# EAGLE board SOT23-6_2xSOT23 (EAGLE 6.4)
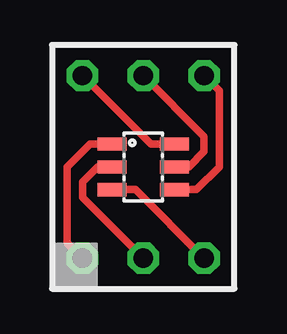
[diagram p0: board, top side]
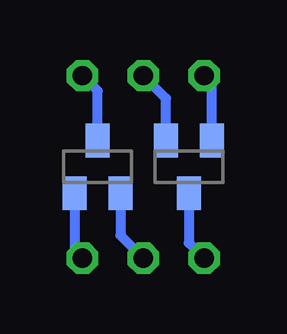
[diagram p1: board, bottom side, seen from below]

No outline drawn. Coordinates in mm, seen from the top.
Copper layers (1*16): Top 0.035mm / dielectric 1.5mm / Bottom 0.035mm
Design rules "default": minimum track width 10mil, minimum drill 0.6mm, track to track 8mil, track to pad 8mil, pad to pad 8mil, via to via 8mil, smd to smd 8mil, copper to edge 40mil, drill to drill 8mil, minimum pad ring 10mil, minimum via ring 8mil, stop-mask expansion 4mil, vias tented up to drill 0mil, thermal gap 10mil

## Footprints (pad centres in the part's own frame; a part is rotated, then mirrored left to right if it is on the bottom)
1 = drill 0.8 octagon: P$1 0,0
SOT23-6L = smd 0.55 x 1.2: 1 -0.95,-1.3; 2 0,-1.3; 3 0.95,-1.3; 4 0.95,1.3; 5 0,1.3; 6 -0.95,1.3
SOT23B-3 = smd 1 x 1.4: 1 -0.95,-1.1; 2 0.95,-1.1; 3 0,1.1

## Placement (x,y rotation side)
E$1  [1]  1.27,8.89 0 top
E$2  [SOT23-6L]  3.81,5.08 270 top
E$3  [1]  3.81,8.89 0 top
E$4  [1]  6.35,8.89 0 top
E$5  [1]  1.27,1.27 0 top
E$6  [1]  3.81,1.27 0 top
E$7  [1]  6.35,1.27 0 top
E$8  [SOT23B-3]  1.91,5.08 180 bottom
E$9  [SOT23B-3]  5.71,5.08 0 bottom

## Library data of the parts
E$1 E$3-E$7 = drill
E$2 E$8 E$9 = ref-packages

## Nets
S$1: E$2.1 E$5.P$1 E$8.3
S$2: E$2.2 E$6.P$1 E$9.2
S$3: E$2.3 E$7.P$1 E$9.1
S$4: E$2.4 E$4.P$1 E$9.3
S$5: E$2.5 E$3.P$1 E$8.2
S$6: E$1.P$1 E$2.6 E$8.1

## Tracks (layer width: path | path; a pad name or v marks a point on that pad's centre or on a via)
S$1
  Top 0.305: E$5.P$1 0.64,1.91 0.64,5.08 1.58,6.03 E$2.1
  Bottom 0.406: E$8.3 1.91,1.91 E$5.P$1
S$2
  Top 0.305: E$6.P$1 1.27,3.81 1.27,4.45 1.91,5.08 E$2.2
  Bottom 0.406: E$9.2 4.76,2.23 E$6.P$1
S$3
  Top 0.305: E$7.P$1 3.49,4.13 E$2.3
  Bottom 0.406: E$9.1 6.67,1.58 E$7.P$1
S$4
  Top 0.305: E$4.P$1 6.99,8.26 6.99,5.08 6.04,4.13 E$2.4
  Bottom 0.406: E$9.3 5.71,8.26 E$4.P$1
S$5
  Top 0.305: E$3.P$1 6.35,6.35 6.35,5.71 5.71,5.08 E$2.5
  Bottom 0.406: E$8.2 2.85,7.93 E$3.P$1
S$6
  Top 0.305: E$1.P$1 4.13,6.03 E$2.6
  Bottom 0.406: E$8.1 0.95,8.57 E$1.P$1